# Altium PCB ext_adboard.PcbDoc
Units mm, origin at the board's own origin, x right, y up, seen from the top; angles counter-clockwise.
Board outline 60.26 x 70.25 mm, 2 copper layers (Top Layer, Bottom Layer); 3 components, 25 nets, 49 pads, 8 vias.
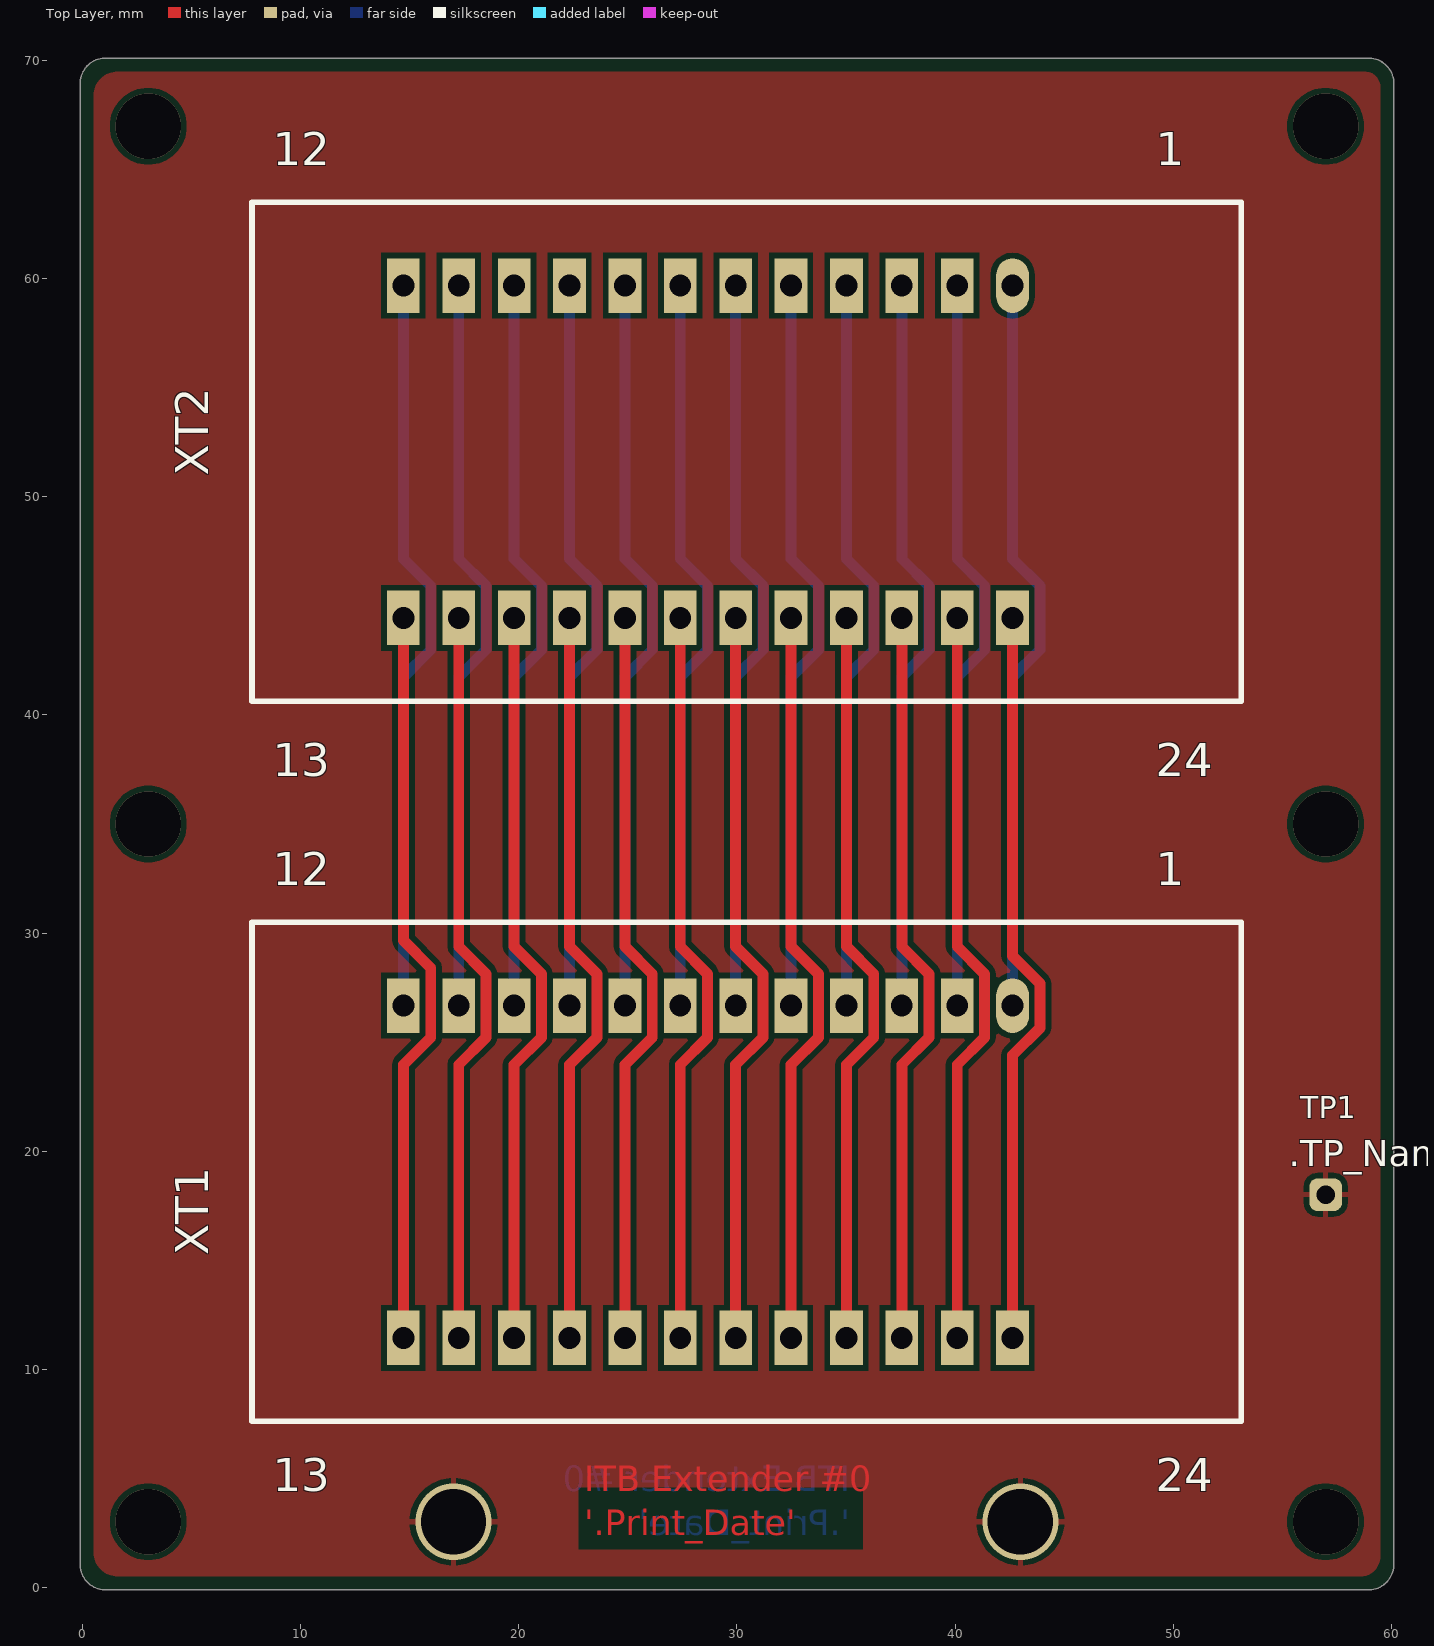
[diagram p0: Top Layer view]
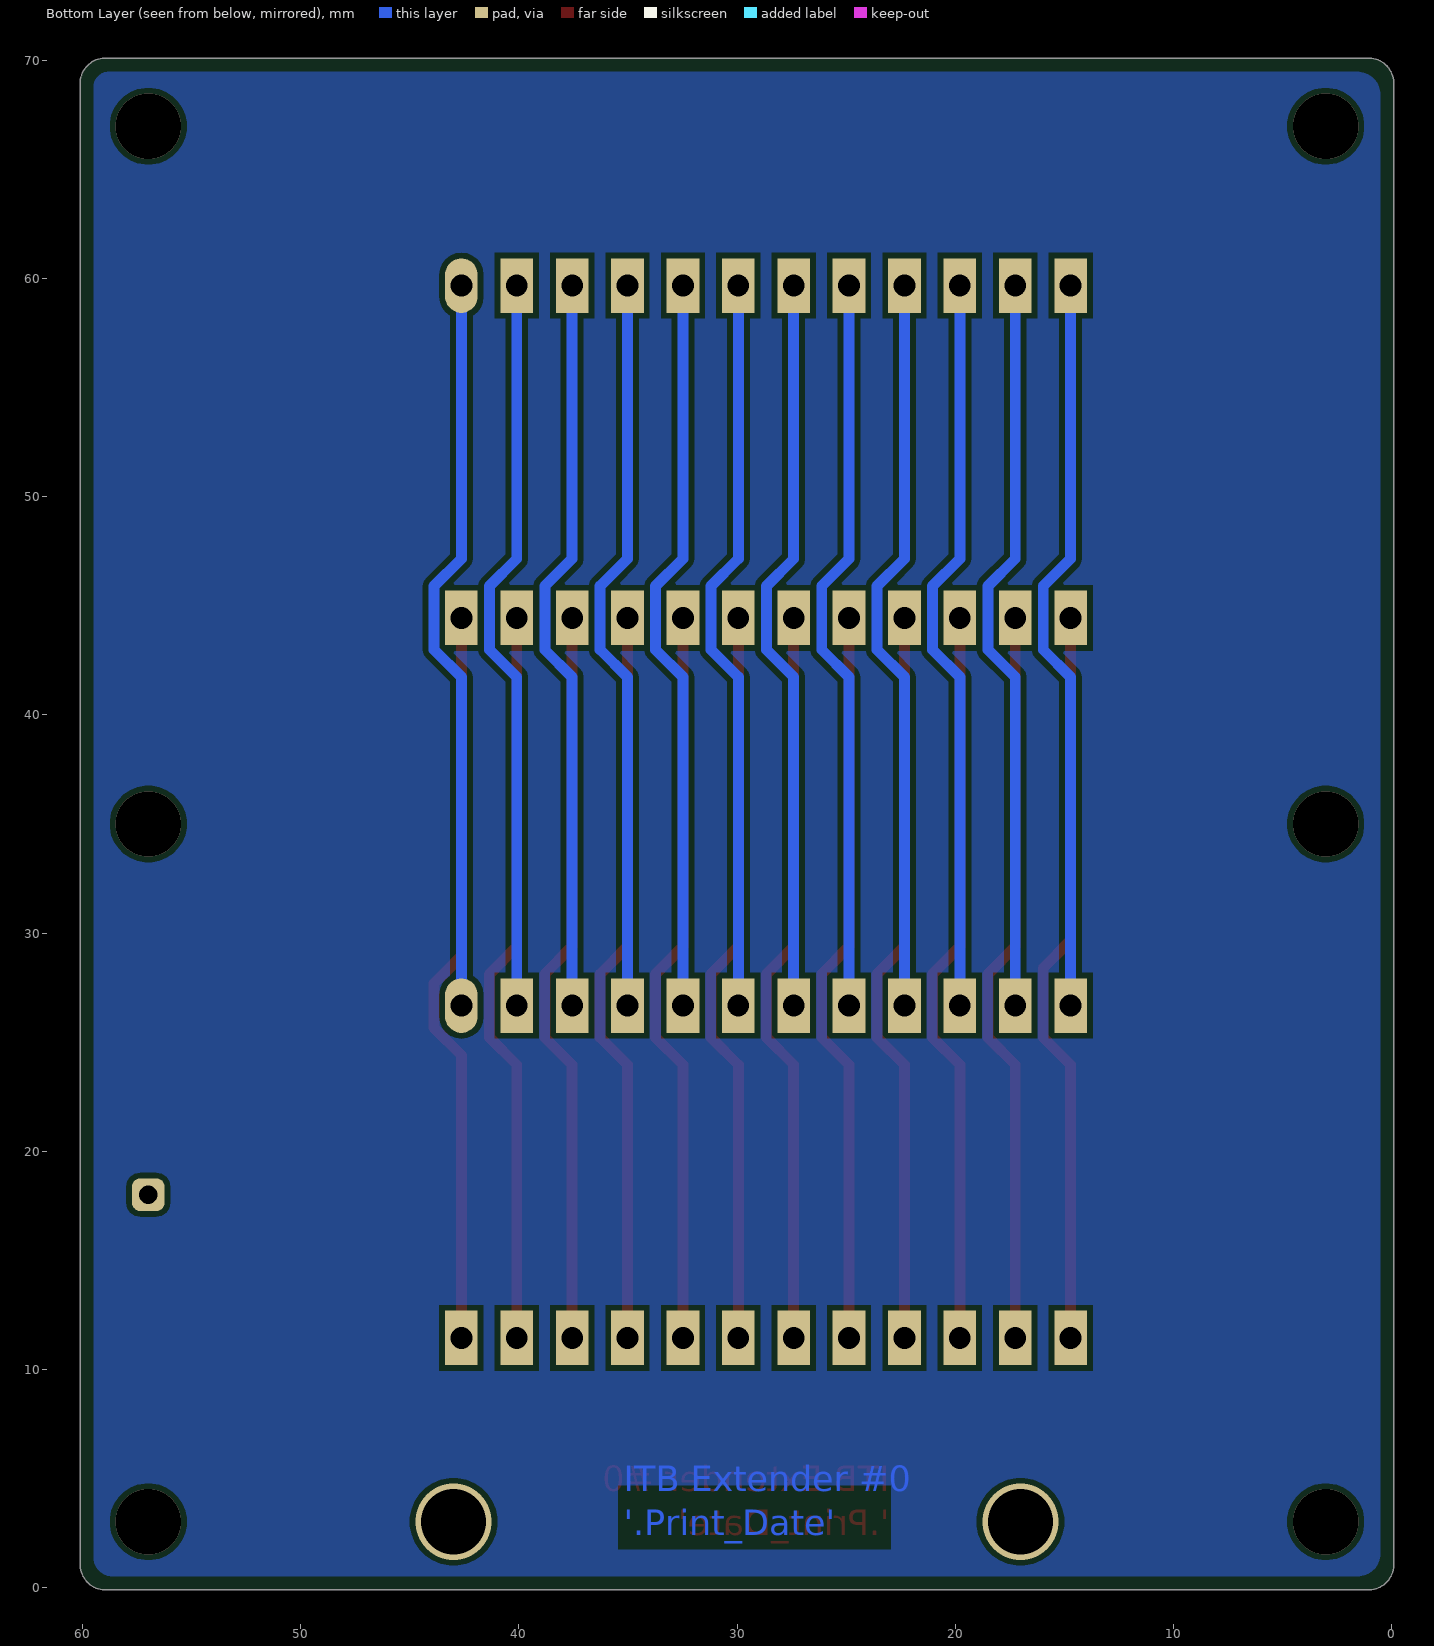
[diagram p1: Bottom Layer view, seen from below]

## Layer stack, top to bottom
Top Solder: solder mask 0.0102, Solder Resist, Dk 3.5
Top Layer: signal copper 0.0356
Dielectric 1: dielectric 0.32, FR-4, Dk 4.8
Bottom Layer: signal copper 0.0356
Bottom Solder: solder mask 0.0102, Solder Resist, Dk 3.5

## Board outline
-0.127,0.994 ccw(c1.05,1.05) 0.994,-0.127 1,-0.127 58.897,-0.127 ccw(c58.95,1.05) 60.127,0.994 60.127,1 60.127,68.897 60.129,68.95 ccw(c58.95,68.95) 59.006,70.127 58.9,70.127 1.102,70.127 ccw(c1.05,68.95) -0.127,69.006 -0.127,69

## Design rules (kind name [scope] priority, off if disabled: settings)
Clearance [All] p1: gap=0.254 ignorepadtopadclearanceinfootprint=FALSE except(0: Arc-Hole Track-Hole SMDPad-Hole THPad-Hole Via-Hole Fill-Hole Poly-Hole Region-Hole Text-Hole)
PolygonConnect [All] p1: connectstyle=Relief reliefconductorwidth=0.254 reliefentries=4 polygonreliefangle="90 Angle" airgapwidth=0.254
RoutingVias [All] p1: holewidth=0.711 width=1.27 viastyle="Through Hole" minholewidth=0.711 minwidth=1.27 maxholewidth=0.711 maxwidth=1.27
SolderMaskExpansion [All] p1: expansion=0.102 istentingtop=FALSE
Width [All] p1: maxlimit=0.5 minlimit=0.5 preferedwidth=0.5
30 further rules are at their usual default settings.

## Components (designator, comment, footprint, x,y, rotation, side; value= is the part's Value field where it differs from the comment)
TP1 "GND" TestPoint 57,18 r0 top
XT1 "DS-1043-24" DS-1043-24 42.64,26.67 r180 top
XT2 "DS-1043-24" DS-1043-24 42.64,59.69 r180 top

## Footprints (in the part's own frame and the unit in brackets; to place one, negate y for a bottom-side part, rotate by r counter-clockwise, add the part's x,y. Pads: shape width x height; smd on the part's side, far side on the other; paste and mask are expansions set on the pad)
DS-1043-24 [mm] "DIP-24 ZIF socket"
  oval 1.5x2.5 hole 1: 1(0,0)
  rect 1.5x2.5 hole 1: 2(2.54,0) 3(5.08,0) 4(7.62,0) 5(10.16,0) 6(12.7,0) 7(15.24,0) 8(17.78,0) 9(20.32,0) 10(22.86,0) 11(25.4,0) 12(27.94,0) 13(27.94,15.24) 14(25.4,15.24) 15(22.86,15.24) 16(20.32,15.24) 17(17.78,15.24) 18(15.24,15.24) 19(12.7,15.24) 20(10.16,15.24) 21(7.62,15.24) 22(5.08,15.24) 23(2.54,15.24) 24(0,15.24)
  silkscreen extent -10.49,-3.83 34.88,19.07, body extent -10.5,-4.82 34.8,19.07, height 23.1
TestPoint [mm]
  rrect50% 1.5x1.5 hole 0.85: 0(0,0)

## Part data
TP1: library part TP, TP_Name=GND, Назначение="Контроль параметров платы", Наименование="Точка проверки"
XT1 XT2: "DIP-24 Zero Insertion Force (ZIF) socket", Назначение="Панель с нулевым усилием (ZIF) для DIP-24", Наименование=DS-1043-24

## Via types
v1: diameter 3, hole 3, Top Layer to Bottom Layer, 6 vias
v2: diameter 3.5, hole 3, Top Layer to Bottom Layer, 2 vias

## Nets (pads, with @x,y where several pads share a name; then routed paths per layer and width w, separated by ;. In a path a pad name is that pad's centre, name@x,y a point inside that pad or via, vN(x,y) a via of type N, cw(c..) or ccw(c..) an arc to the next point about the centre after c; other vN are vias at no path point)
GND: TP1.0
  other v2: 17,3 43,3
Net1: XT1.1 XT2.1 | length 34.1
  Bottom Layer w0.5: XT1.1 42.64,41.737 43.894,42.991 43.894,45.909 42.64,47.163 XT2.1
Net2: XT1.2 XT2.2 | length 34.1
  Bottom Layer w0.5: XT1.2 40.1,41.737 41.354,42.991 41.354,45.909 40.1,47.163 XT2.2
Net3: XT1.3 XT2.3 | length 34.1
  Bottom Layer w0.5: XT1.3 37.56,41.737 38.814,42.991 38.814,45.909 37.56,47.163 XT2.3
Net4: XT1.4 XT2.4 | length 34.1
  Bottom Layer w0.5: XT1.4 35.02,41.737 36.274,42.991 36.274,45.909 35.02,47.163 XT2.4
Net5: XT1.5 XT2.5 | length 34.1
  Bottom Layer w0.5: XT1.5 32.48,41.737 33.734,42.991 33.734,45.909 32.48,47.163 XT2.5
Net6: XT1.6 XT2.6 | length 34.1
  Bottom Layer w0.5: XT1.6 29.94,41.737 31.194,42.991 31.194,45.909 29.94,47.163 XT2.6
Net7: XT1.7 XT2.7 | length 34.1
  Bottom Layer w0.5: XT1.7 27.4,41.737 28.654,42.991 28.654,45.909 27.4,47.163 XT2.7
Net8: XT1.8 XT2.8 | length 34.1
  Bottom Layer w0.5: XT1.8 24.86,41.737 26.114,42.991 26.114,45.909 24.86,47.163 XT2.8
Net9: XT1.9 XT2.9 | length 34.1
  Bottom Layer w0.5: XT1.9 22.32,41.737 23.574,42.991 23.574,45.909 22.32,47.163 XT2.9
Net10: XT1.10 XT2.10 | length 34.1
  Bottom Layer w0.5: XT1.10 19.78,41.737 21.034,42.991 21.034,45.909 19.78,47.163 XT2.10
Net11: XT1.11 XT2.11 | length 34.1
  Bottom Layer w0.5: XT1.11 17.24,41.737 18.494,42.991 18.494,45.909 17.24,47.163 XT2.11
Net12: XT1.12 XT2.12 | length 34.1
  Bottom Layer w0.5: XT1.12 14.7,41.737 15.954,42.991 15.954,45.909 14.7,47.163 XT2.12
Net13: XT1.13 XT2.13 | length 34.1
  Top Layer w0.5: XT1.13 14.7,23.957 15.954,25.211 15.954,28.399 14.7,29.653 XT2.13
Net14: XT1.14 XT2.14 | length 34.1
  Top Layer w0.5: XT1.14 17.24,23.957 18.494,25.211 18.494,28.129 17.24,29.383 XT2.14
Net15: XT1.15 XT2.15 | length 34.1
  Top Layer w0.5: XT1.15 19.78,23.957 21.034,25.211 21.034,28.129 19.78,29.383 XT2.15
Net16: XT1.16 XT2.16 | length 34.1
  Top Layer w0.5: XT1.16 22.32,23.957 23.574,25.211 23.574,28.129 22.32,29.383 XT2.16
Net17: XT1.17 XT2.17 | length 34.1
  Top Layer w0.5: XT1.17 24.86,23.957 26.114,25.211 26.114,28.129 24.86,29.383 XT2.17
Net18: XT1.18 XT2.18 | length 34.1
  Top Layer w0.5: XT1.18 27.4,23.957 28.654,25.211 28.654,28.129 27.4,29.383 XT2.18
Net19: XT1.19 XT2.19 | length 34.1
  Top Layer w0.5: XT1.19 29.94,23.957 31.194,25.211 31.194,28.129 29.94,29.383 XT2.19
Net20: XT1.20 XT2.20 | length 34.1
  Top Layer w0.5: XT1.20 32.48,23.957 33.734,25.211 33.734,28.129 32.48,29.383 XT2.20
Net21: XT1.21 XT2.21 | length 34.1
  Top Layer w0.5: XT1.21 35.02,23.957 36.274,25.211 36.274,28.129 35.02,29.383 XT2.21
Net22: XT1.22 XT2.22 | length 34.1
  Top Layer w0.5: XT1.22 37.56,23.957 38.814,25.211 38.814,28.129 37.56,29.383 XT2.22
Net23: XT1.23 XT2.23 | length 34.1
  Top Layer w0.5: XT1.23 40.1,23.957 41.354,25.211 41.354,28.129 40.1,29.383 XT2.23
Net24: XT1.24 XT2.24 | length 34.1
  Top Layer w0.5: XT1.24 42.64,24.397 43.894,25.651 43.894,27.689 42.64,28.943 XT2.24
copper on no net:
  other v1: 3,3 57,3 3,35 57,35 3,67 57,67

## Polygon pours and split planes (outlines as drawn)
GND on Top Layer "GND_L01_P000" (solid, pour order 0): 1.6,69.5 58.8,69.5 cw(c58.8,68.8) 59.5,68.8 59.5,1.4 cw(c58.6,1.4) 58.6,0.5 1.6,0.5 cw(c1.6,1.6) 0.5,1.6 0.5,68.4 cw(c1.6,68.4)
no net on Bottom Layer "NONET_L02_P001" (solid, pour order 1): 1.567,69.5 58.82,69.5 cw(c58.82,68.82) 59.5,68.82 59.5,1.363 cw(c58.637,1.363) 58.637,0.5 1.544,0.5 cw(c1.544,1.544) 0.5,1.544 0.5,68.433 cw(c1.567,68.433)

## Other copper
Top Layer:
  text "ITB Extender #0 / '.Print_Date'" at 23,2 h2
Bottom Layer:
  text "ITB Extender #0 / '.Print_Date'" at 35.2,2 h2

## Silkscreen, mask and mechanical layers (free items; w line width, h text height)
Top Overlay:
  text "12" at 8.7,65.2 h1.5
  text "1" at 49.2,65.2 h1.5
  text "13" at 8.7,37.2 h1.5
  text "24" at 49.2,37.2 h1.5
  text "12" at 8.7,32.2 h1.5
  text "1" at 49.2,32.2 h1.5
  text "13" at 8.7,4.4 h1.5
  text "24" at 49.2,4.4 h1.5
Mechanical 1:
  lines w0.254: 0,1 0,69 cw(c1.05,68.95) 1.1,70 58.9,70 ; 0,1.1 ccw(c1.05,1.05) 1,0 59,0 ; 58.9,0 ccw(c58.95,1.05) 60,1 60,68.9 ccw(c58.95,68.95) 59,70